# Altium PCB AltiumPCB_MRR_ESP_3DP_v0.5.pcbdoc
Units mm, origin at the board's own origin, x right, y up, seen from the top; angles counter-clockwise.
Board outline 135.64 x 130.3 mm, 2 copper layers (Top Layer, Bottom Layer); 117 components, 145 nets, 437 pads, 70 vias.
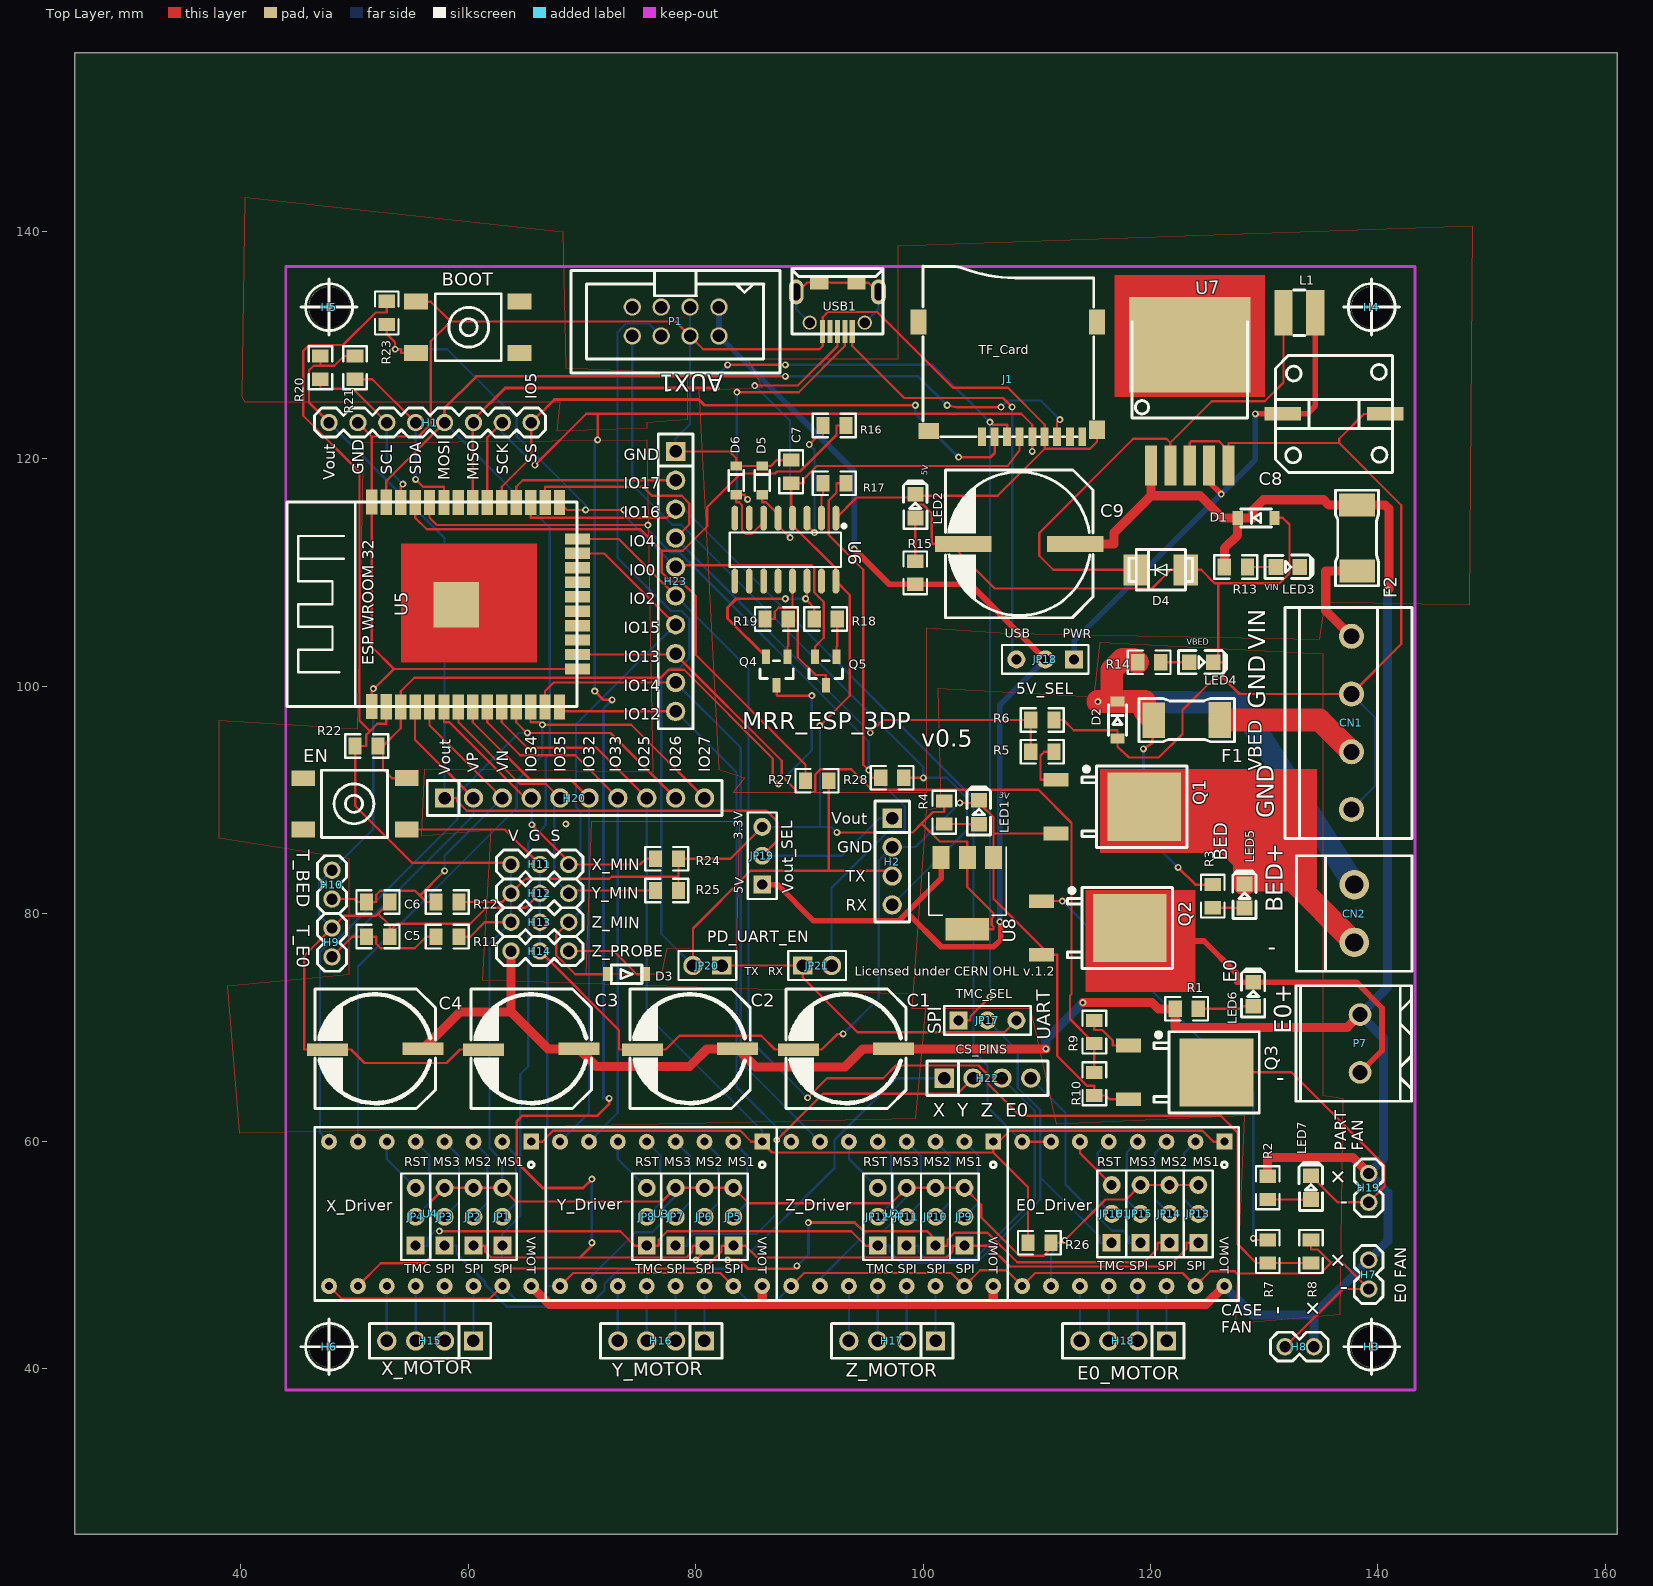
[diagram p0: Top Layer view]
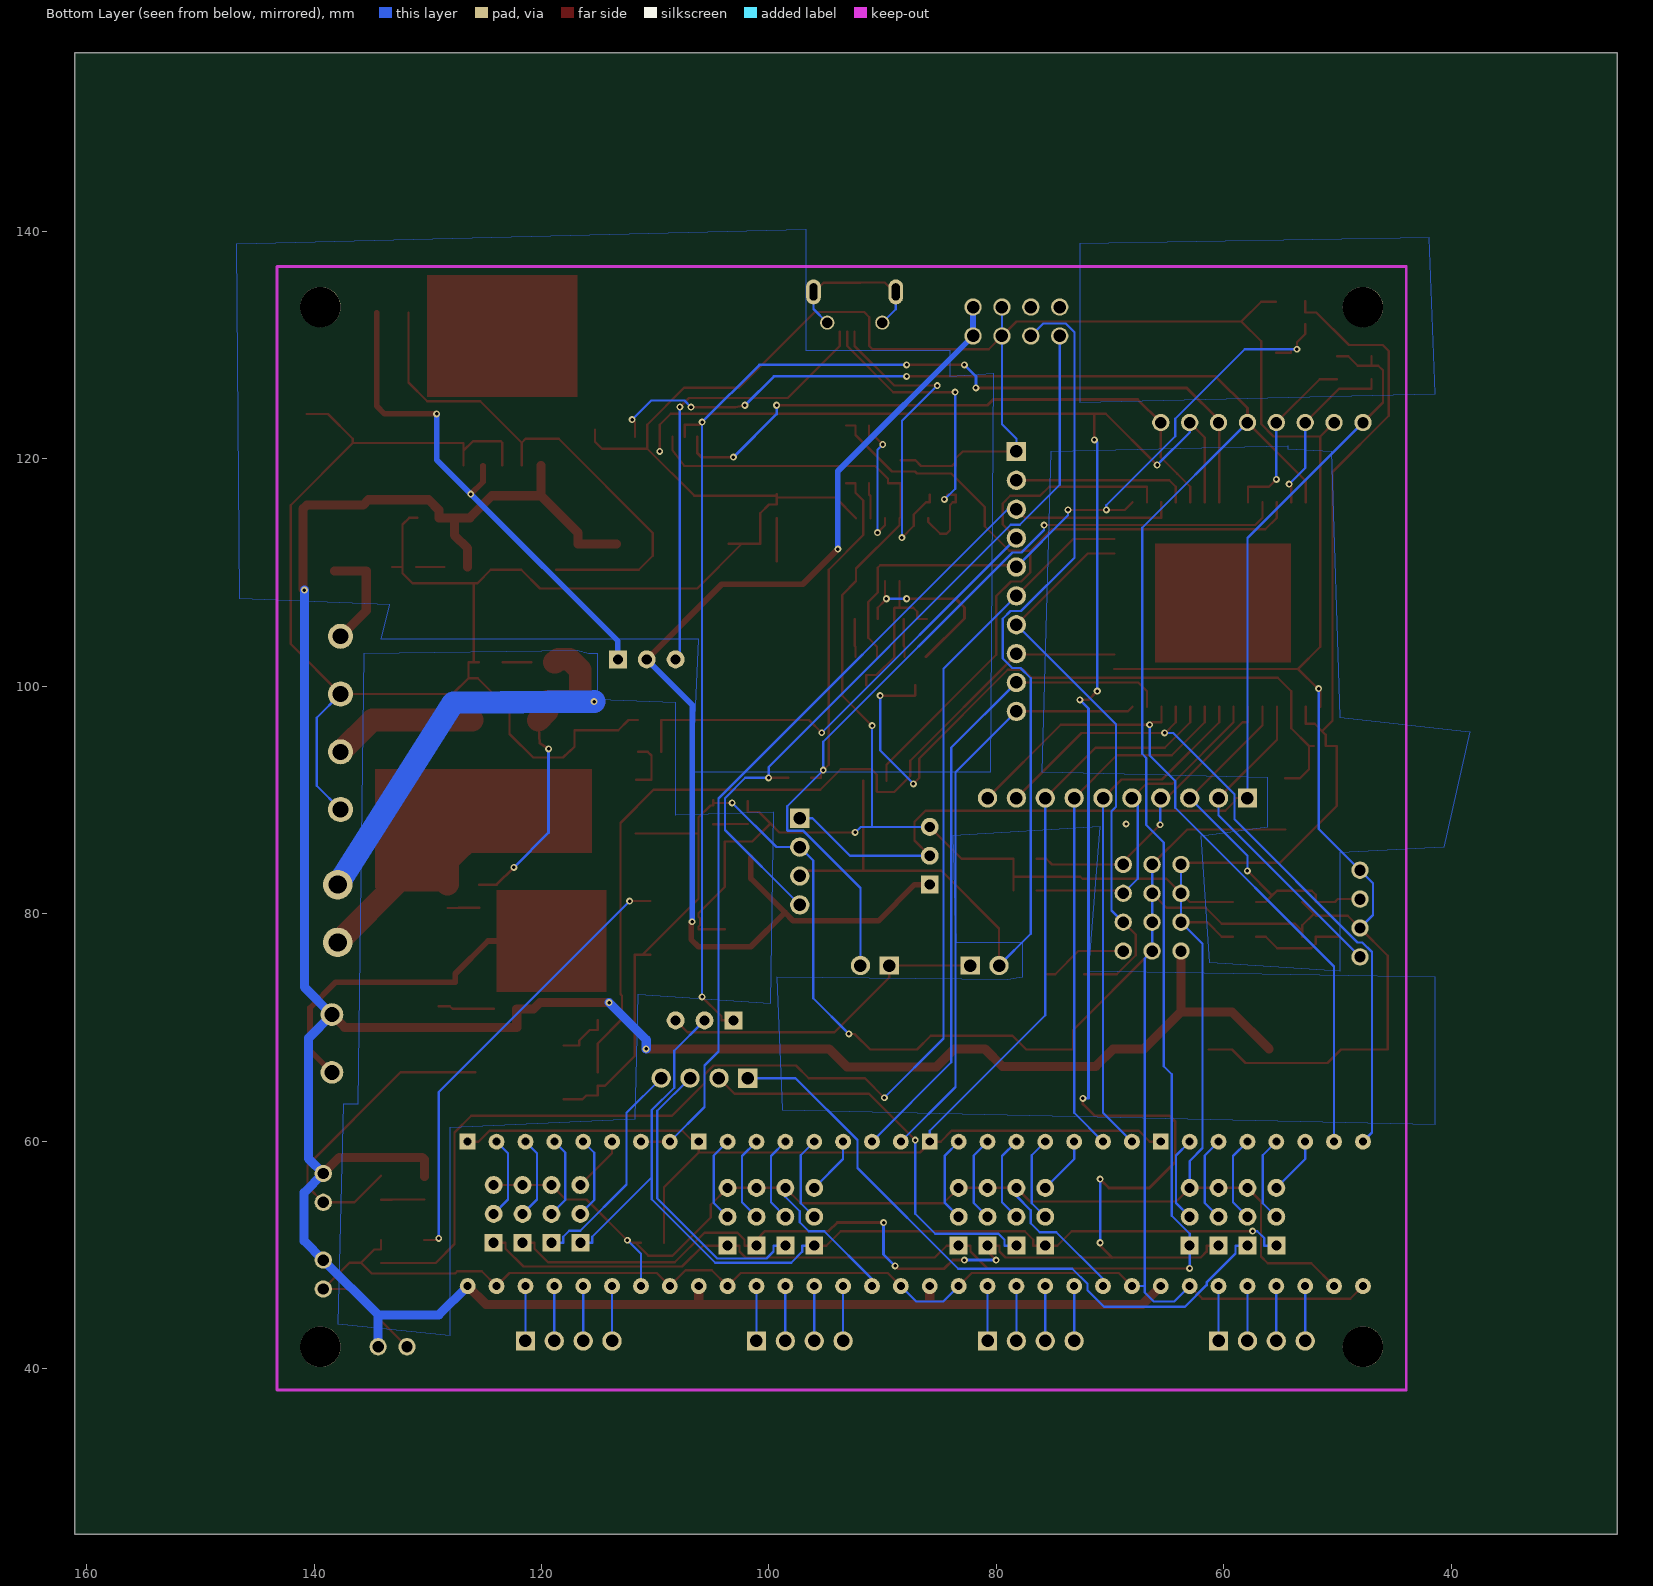
[diagram p1: Bottom Layer view, seen from below]

## Layer stack, top to bottom
Top Layer: signal copper (thickness not stored)
Dielectric: dielectric 0.32, FR-4, Dk 4.8
Bottom Layer: signal copper (thickness not stored)

## Board outline
161.036,25.4 25.4,25.4 25.4,155.702 161.036,155.702

## Components (designator, comment, footprint, x,y, rotation, side; value= is the part's Value field where it differs from the comment)
BOOT "SWITCH,6*6*2.5,SMD" KEY-6.0*6.0 59.944,131.572 r180 top
C1 "470uF" CAP-D10.0XH10.5 93.218,68.072 r0 top
C2 "470uF" CAP-D10.0XH10.5 79.502,68.072 r0 top
C3 "470uF" CAP-D10.0XH10.5 65.532,68.072 r0 top
C4 "470uF" CAP-D10.0XH10.5 51.816,68.072 r0 top
C5 "10uF" 0805 52.07,77.978 r0 top
C6 "10uF" 0805 52.07,81.026 r0 top
C7 "1nF" 0805 88.392,118.872 r90 top
C8 "330uF" CAP-T-10*10 136.144,123.952 r0 top
C9 "680uF" CAP-D12.5XH13.5 108.458,112.522 r0 top
CN1 "MKDS3/4-5.08" MKDS3/4-5.08 137.668,96.774 r90 top
CN2 "HEATBED" MKDS3/2-5.08 137.922,80.01 r0 top
D1 "1N4007" SOD-123F 129.286,114.808 r180 top
D2 "1N4007" SOD-123F 117.094,97.028 r90 top
D3 "1N4148W" SOD-123FL 73.914,74.676 r0 top
D4 "SS54" SMB(DO-214AA) 120.904,110.236 r180 top
D5 "PESD5V0S1BA" SOD-323 85.852,118.11 r90 top
D6 "PESD5V0S1BA" SOD-323 83.566,118.11 r90 top
EN "SWITCH,6*6*2.5,SMD" KEY-6.0*6.0 50.038,89.662 r0 top
F1 "0451020.MRL" SMF_045X 123.19,97.028 r180 top
F2 "0451003.MRL" SMF_045X 138.176,113.03 r90 top
H1 "I2C/SPI" 210S-1X8P 56.642,123.19 r0 top
H2 "Serial" DIP-1X4P-2.54MM-M 97.282,84.582 r270 top
H3 "HOLE" HOLE_3MM5 139.446,41.91 r0 top
H4 "HOLE" HOLE_3MM5 139.446,133.35 r0 top
H5 "HOLE" HOLE_3MM5 47.752,133.35 r0 top
H6 "HOLE" HOLE_3MM5 47.752,41.91 r0 top
H7 "FAN_HEATSINK" 210S-1X2P 139.192,48.26 r270 top
H8 "FAN_CASE" 210S-1X2P 133.096,41.91 r180 top
H9 "T_E0" 210S-1X2P 48.006,77.47 r90 top
H10 "T_BED" 210S-1X2P 48.006,82.55 r90 top
H11 "X_MIN" 210S-1X3P 66.294,84.328 r0 top
H12 "Y_MIN" 210S-1X3P 66.294,81.788 r0 top
H13 "Z_MIN" 210S-1X3P 66.294,79.248 r0 top
H14 "Z_PROBE" 210S-1X3P 66.294,76.708 r0 top
H15 "X_MOTOR" DIP-1X4P-2.54MM-M 56.642,42.418 r180 top
H16 "Y_MOTOR" DIP-1X4P-2.54MM-M 76.962,42.418 r180 top
H17 "Z_MOTOR" DIP-1X4P-2.54MM-M 97.282,42.418 r180 top
H18 "E0_MOTOR" DIP-1X4P-2.54MM-M 117.602,42.418 r180 top
H19 "FAN_E0" 210S-1X2P 139.192,55.88 r270 top
H20 "ESP_PINS1" DIP-1X10P-2.54MM-M 69.342,90.17 r0 top
H22 "CS_PINS" DIP-1X4P-2.54MM-M 105.664,65.532 r0 top
H23 "ESP_PINS2" DIP-1X10P-2.54MM-M 78.232,109.22 r270 top
J1 "Micro SD Card Holder" MICRO-SD9+4P-SMD-16.1X14.5X1.85MM 107.442,127 r90 top
JP1 "JP_X_MS1" HDR-3X1/2.54 62.992,53.34 r90 top
JP2 "JP_X_MS2" HDR-3X1/2.54 60.452,53.34 r90 top
JP3 "JP_X_MS3" HDR-3X1/2.54 57.912,53.34 r90 top
JP4 "JP_X_RST" HDR-3X1/2.54 55.372,53.34 r90 top
JP5 "JP_Y_MS1" HDR-3X1/2.54 83.312,53.34 r90 top
JP6 "JP_Y_MS2" HDR-3X1/2.54 80.772,53.34 r90 top
JP7 "JP_Y_MS3" HDR-3X1/2.54 78.232,53.34 r90 top
JP8 "JP_Y_RST" HDR-3X1/2.54 75.692,53.34 r90 top
JP9 "JP_Z_MS1" HDR-3X1/2.54 103.632,53.34 r90 top
JP10 "JP_Z_MS2" HDR-3X1/2.54 101.092,53.34 r90 top
JP11 "JP_Z_MS3" HDR-3X1/2.54 98.552,53.34 r90 top
JP12 "JP_Z_RST" HDR-3X1/2.54 96.012,53.34 r90 top
JP13 "JP_E0_MS1" HDR-3X1/2.54 124.206,53.594 r90 top
JP14 "JP_E0_MS2" HDR-3X1/2.54 121.666,53.594 r90 top
JP15 "JP_E0_MS3" HDR-3X1/2.54 119.126,53.594 r90 top
JP16 "JP_E0_RST" HDR-3X1/2.54 116.586,53.594 r90 top
JP17 "TMC_SEL" HDR-3X1/2.54 105.664,70.612 r0 top
JP18 "5V_SEL" HDR-3X1/2.54 110.744,102.362 r180 top
JP19 "Vout_SEL" HDR-3X1/2.54 85.852,85.09 r90 top
JP20 "PD_UART_TX" HDR-2X1/2.54 82.296,75.438 r270 top
JP21 "PD_UART_RX" HDR-2X1/2.54 89.408,75.438 r90 top
L1 "47uH" SLF4532 133.096,132.842 r0 top
LED1 "LED_3V" LED-0805#1 104.902,88.9 r270 top
LED2 "LED_5V" LED-0805#1 99.314,115.824 r270 top
LED3 "LED_VIN" LED-0805#2 132.08,110.49 r180 top
LED4 "LED_VBED" LED-0805#2 124.46,102.108 r180 top
LED5 "BED" LED-0805#1 128.27,81.534 r270 top
LED6 "E0" LED-0805#1 129.032,72.898 r270 top
LED7 "FAN_E0" LED-0805#1 134.112,55.88 r270 top
P1 "AUX1" HDR-IDC-2.54-2X4P 78.232,132.08 r180 top
P7 "HOTEND_E0" WJ500V-5.08-2P 138.43,68.58 r90 top
Q1 "IPD036N04L G" TO-252-2(2) 115.57,89.408 r270 top
Q2 "IRLR8743TRPBF" TO-252-2 114.3,78.74 r270 top
Q3 "IRLR8743TRPBF" TO-252-2 121.92,66.04 r270 top
Q4 "S9014" SOT-23(SOT-23-3) 87.122,101.346 r180 top
Q5 "S9014" SOT-23(SOT-23-3) 91.44,101.346 r180 top
R1 "1.5KΩ(152)" 0805 123.19,71.628 r0 top
R2 "1.5KΩ(152)" 0805 130.302,55.88 r270 top
R3 "1.5KΩ(152)" 0805 125.476,81.534 r270 top
R4 "220Ω(221)" 0805 101.854,88.9 r270 top
R5 "10Ω(10R)" 0805 110.49,94.234 r0 top
R6 "100K" 0805 110.49,97.028 r0 top
R7 "10Ω(10R)" 0805 130.302,50.292 r90 top
R8 "100K" 0805 134.112,50.292 r90 top
R9 "10Ω(10R)" 0805 115.062,69.596 r90 top
R10 "100K" 0805 115.062,65.024 r270 top
R11 "47KΩ(473)" 0805 58.166,77.978 r0 top
R12 "47KΩ(473)" 0805 58.166,81.026 r0 top
R13 "1.5KΩ(152)" 0805 127.508,110.49 r0 top
R14 "2.2K" 0805 119.888,102.108 r0 top
R15 "330Ω(331)" 0805 99.314,109.982 r90 top
R16 "0Ω" 0805 92.202,122.936 r0 top
R17 "0Ω" 0805 92.202,117.856 r0 top
R18 "12KΩ(123)" 0805 91.44,105.918 r0 top
R19 "12KΩ(123)" 0805 87.122,105.918 r0 top
R20 "4.7KΩ(472)" 0805 46.99,128.016 r90 top
R21 "4.7KΩ(472)" 0805 50.038,128.016 r90 top
R22 "12KΩ(123)" 0805 51.054,94.742 r180 top
R23 "12KΩ(123)" 0805 52.832,132.842 r90 top
R24 "10KΩ" 0805 77.47,84.836 r0 top
R25 "10KΩ" 0805 77.47,82.042 r0 top
R26 "10KΩ" 0805 110.236,51.054 r0 top
R27 "1KΩ" 0805 90.678,91.694 r0 top
R28 "1KΩ" 0805 97.282,91.948 r0 top
U1 "POLULU_DRIVER" POLULU_DRIVER 126.492,59.944 r180 top
U2 "POLULU_DRIVER" POLULU_DRIVER 106.172,59.944 r180 top
U3 "POLULU_DRIVER" POLULU_DRIVER 85.852,59.944 r180 top
U4 "POLULU_DRIVER" POLULU_DRIVER 65.532,59.944 r180 top
U5 "ESP32-WROOM" ESP32_WROOM_FOOTPRINT 58.928,107.188 r90 top
U6 "CH340C" SOP-16_150MIL 87.884,112.014 r270 top
U7 "LM2596SX-5.0/NOPB" TO-263-5 123.444,124.714 r270 top
U8 "AMS1117-3.3" SOT-223 103.886,81.788 r270 top
USB1 "micro USBFemale" MICRO-USB-1 92.456,133.35 r90 top

## Footprints (in the part's own frame and the unit in brackets; to place one, negate y for a bottom-side part, rotate by r counter-clockwise, add the part's x,y. Pads: shape width x height; smd on the part's side, far side on the other; paste and mask are expansions set on the pad)
210S-1X2P [mil]
  round 60 hole 39.37: 1(-50,0) 2(50,0)
  silkscreen extent -100,-50 100,50
210S-1X3P [mil]
  round 60 hole 39.37: 1(-100,0) 2(0,0) 3(100,0)
  silkscreen extent -150,-50 150,50
210S-1X8P [mil]
  round 60 hole 39.37: 1(-350,0) 2(-250,0) 3(-150,0) 4(-50,0) 5(50,0) 6(150,0) 7(250,0) 8(350,0)
  silkscreen extent -400,-50 400,50
0805 [mm]
  rect 1.16x1.47 smd: 1(-1.016,0) 2(1.016,0)
  silkscreen extent -1.9,-1.03 1.87,1.04
CAP-D10.0XH10.5 [mm]
  rect 3.6x1.1 smd: 1(4.191,0.025) 2(-4.191,-0.025)
  silkscreen extent -5.29,-5.22 5.29,5.3
CAP-D12.5XH13.5 [mm]
  rect 5x1.4 smd: 1(4.928,0) 2(-4.928,0)
  silkscreen extent -6.5,-6.5 6.5,6.5
CAP-T-10*10 [mm]
  rect 3.2x1.2 smd: 1(-4.501,0) 2(4.501,0)
  silkscreen extent -5.15,-5.15 5.15,5.15
DIP-1X4P-2.54MM-M [mm]
  rect 1.7x1.7 hole 1.1: 1(-3.81,0)
  round 1.7 hole 1.1: 2(-1.27,0) 3(1.27,0) 4(3.81,0)
  silkscreen extent -5.33,-1.52 5.33,1.52
DIP-1X10P-2.54MM-M [mm]
  rect 1.7x1.7 hole 1.1: 1(-11.43,0)
  round 1.7 hole 1.1: 2(-8.89,0) 3(-6.35,0) 4(-3.81,0) 5(-1.27,0) 6(1.27,0) 7(3.81,0) 8(6.35,0) 9(8.89,0) 10(11.43,0)
  silkscreen extent -12.95,-1.52 12.95,1.52
ESP32_WROOM_FOOTPRINT [mm]
  rect 2.2x1 smd: 1(-8.989,7.423) 2(-8.992,6.147) 3(-8.994,4.879) 4(-8.994,3.609) 5(-8.994,2.339) 6(-8.994,1.069) 7(-8.994,-0.201) 8(-8.997,-1.468) 9(-8.997,-2.738) 10(-8.997,-4.008) 11(-8.997,-5.278) 12(-8.994,-6.551) 13(-8.994,-7.821) 14(-8.994,-9.091) 25(8.992,-9.093) 26(8.992,-7.823) 27(8.992,-6.553) 28(8.989,-5.281) 29(8.989,-4.011) 30(8.989,-2.741) 31(8.989,-1.471) 32(8.992,-0.203) 33(8.992,1.067) 34(8.992,2.337) 35(8.992,3.607) 36(8.992,4.877) 37(8.994,6.144) 38(8.997,7.421)
  rect 1x2.2 smd: 15(-5.667,-10.693) 16(-4.397,-10.693) 17(-3.127,-10.693) 18(-1.859,-10.696) 19(-0.589,-10.696) 20(0.681,-10.696) 21(1.951,-10.696) 22(3.223,-10.693) 23(4.493,-10.693) 24(5.763,-10.693)
  rect 4x4 smd: 39(-0.001,-0.011)
  silkscreen extent -8.97,-10.63 9.03,14.87
HDR-2X1/2.54 [mm]
  rect 1.575x1.7 hole 1.1: 1(0,0)
  round 1.7 hole 1.1: 2(0,-2.54)
  silkscreen extent -1.27,-3.81 1.27,1.27
HDR-3X1/2.54 [mil]
  rect 62x62 hole 35: 1(-100,0)
  round 62 hole 35: 2(0,0) 3(100,0)
  silkscreen extent -150,-50 150,50
HDR-IDC-2.54-2X4P [mil]
  round 60 hole 43.3: 1(-150,-50) 2(-150,50) 3(-50,-50) 4(-50,50) 5(50,-50) 6(50,50) 7(150,-50) 8(150,50)
  silkscreen extent -361,-177 362,178
HOLE_3MM5 [mil]
  round 140 hole 140: 1(0,0)
  silkscreen extent -96,-96 96,96
KEY-6.0*6.0 [mm]
  rect 2.1x1.4 smd: 1(4.55,-2.252) 2(-4.553,-2.252) 3(4.553,2.252) 4(-4.553,2.249)
  silkscreen extent -2.95,-2.95 2.85,2.95
LED-0805#1 [mil]
  rect 51.2x55.1 smd: 1(40.7,0.05) 2(-42,0.05)
  silkscreen extent -88,-41 78,40
LED-0805#2 [mil]
  rect 51.2x55.1 smd: 1(41.4,-0.05) 2(-41.3,-0.05)
  silkscreen extent -88,-41 78,40
MICRO-SD9+4P-SMD-16.1X14.5X1.85MM [mil]
  rect 63x27.6 smd: 1(-199,89) 2(-199,45) 3(-199,2) 4(-199,-41) 5(-199,-85) 6(-199,-128) 7(-199,-171) 8(-199,-215) 9(-199,-258)
  rect 63x55.1 smd: G1(-175,-309.05)
  rect 86.6x55.1 smd: G2(199,-309.05) G3(199,308.95)
  rect 55.1x70.9 smd: G4(-179.05,273.95)
  silkscreen extent -199,-298 392,293
MICRO-USB-1 [mm]
  round 1.25 hole 0.9: 0(-1.371,2.431) 0(-1.371,-2.41)
  oval 2.2x1.3 hole 0.7 slot 1.5 at 0 deg: 0(1.329,3.619) 0(1.329,-3.619)
  rect 1.2x1.6 smd: 0(2.14,-1.684) 0(2.156,1.595)
  rect 2x0.45 smd: 1(-2.156,-1.311) 2(-2.156,-0.66) 3(-2.156,-0.011) 4(-2.156,0.639) 5(-2.156,1.289)
  silkscreen extent -2.36,-4 3.4,4
MKDS3/2-5.08 [mm]
  round 2.6 hole 1.6: 1(0,-2.54) 2(0,2.54)
  silkscreen extent -5.08,-5.08 5.08,5.08
MKDS3/4-5.08 [mm]
  round 2.2 hole 1.4: 1(-7.62,0) 2(-2.54,0) 3(2.54,0) 4(7.62,0)
  silkscreen extent -10.16,-5.33 10.16,5.84
POLULU_DRIVER [mil]
  rect 55x55 hole 28: 1(0,0)
  round 55 hole 28: 2(100,0) 3(200,0) 4(300,0) 5(400,0) 6(500,0) 7(600,0) 8(700,0) 9(700,500) 10(600,500) 11(500,500) 12(400,500) 13(300,500) 14(200,500) 15(100,500) 16(0,500)
  silkscreen extent -50,-50 750,550
SLF4532 [mm]
  rect 1.6x4 smd: 1(-1.4,0) 2(1.4,0)
  silkscreen extent -0.5,-2 0.5,2
SMB(DO-214AA) [mil]
  rect 85x108 smd: 1(-87,0) 2(87,0)
  silkscreen extent -110,-70 110,70
SMF_045X [mm]
  rect 2x3.15 smd: 1(-2.904,-0.013) 2(2.904,0.013)
  silkscreen extent -4.19,-1.89 4.21,1.91
SOD-123F [mil]
  rect 35.8x48 smd: 1(-64,0) 2(64,0)
  silkscreen extent -53,-31 53,31
SOD-123FL [mil]
  rect 35.8x48 smd: 1(64,0) 2(-64,0)
  silkscreen extent -53,-32 53,32
SOD-323 [mm]
  rect 0.8x1 smd: 1(-1.269,0) 2(1.271,0)
  silkscreen extent -0.89,-0.66 0.89,0.66
SOP-16_150MIL [mm]
  oval 2.2x0.6 smd: 1(-2.769,4.445) 2(-2.769,3.175) 3(-2.769,1.905) 4(-2.769,0.635) 5(-2.769,-0.635) 6(-2.769,-1.905) 7(-2.769,-3.175) 8(-2.769,-4.445) 9(2.769,-4.445) 10(2.769,-3.175) 11(2.769,-1.905) 12(2.769,-0.635) 13(2.769,0.635) 14(2.769,1.905) 15(2.769,3.175) 16(2.769,4.445)
  silkscreen extent -2.23,-4.9 1.52,5.3
SOT-23(SOT-23-3) [mm]
  rect 0.7x1.25 smd: 1(-0.95,-1.25) 2(0.95,-1.25) 3(0,1.25)
  silkscreen extent -1.46,-0.9 1.46,0.65
SOT-223 [mm]
  rect 2x1.5 smd: 1(-3.15,2.3) 2(-3.15,0) 3(-3.15,-2.3)
  rect 2x3.8 smd: 4(3.15,0)
  silkscreen extent -4.1,-3.41 1.91,3.41
TO-252-2 [mm]
  rect 1.2x2.2 smd: 1(-2.362,-3.876) 3(2.362,-3.871)
  rect 6x6.5 smd: 4(0,3.877)
  silkscreen extent -3.57,-1.61 3.57,7.64
TO-252-2(2) [mm]
  rect 1.2x2.2 smd: 1(-2.362,-3.876) 3(2.362,-3.871)
  rect 6x6.5 smd: 2(0,3.877)
  silkscreen extent -3.57,-1.61 3.57,7.64
TO-263-5 [mil]
  rect 137.79x42.1 smd: 1(209,-133.95) 2(209,-66.95) 3(209,0.05) 4(209,67.05) 5(209,134.05)
  rect 329.92x419.68 smd: 6(-209,0)
  silkscreen extent -289,-200 44,200
WJ500V-5.08-2P [mm]
  round 2 hole 1.3: 1(-2.54,0) 2(2.54,0)
  silkscreen extent -5.08,-4.52 5.08,5.64

## Via types
v1: diameter 0.61, hole 0.31, Top Layer to Bottom Layer, 48 vias
v2: diameter 0.62, hole 0.305, Top Layer to Bottom Layer, 22 vias

## Nets (pads, with @x,y where several pads share a name; then routed paths per layer and width w, separated by ;. In a path a pad name is that pad's centre, name@x,y a point inside that pad or via, vN(x,y) a via of type N, cw(c..) or ccw(c..) an arc to the next point about the centre after c; other vN are vias at no path point)
5V1: C8.1 JP18.1 L1.2 U7.4 | length 44.9
  Top Layer w0.5: U7.4@125.148,119.405 125.148,117.975 v1(126.22,116.901) ; v1(129.217,123.952) 129.492,123.952 C8.1 132.718,123.952 133.794,123.952 134.496,124.653 L1.2
  Bottom Layer w0.5: JP18.1 113.284,103.965 v1(126.22,116.901) 129.217,119.898 v1(129.217,123.952)
+3.3V: C7.1 H11.1 H12.1 H13.1 J1.4 JP1.3 JP2.3 JP3.3 JP5.3 JP6.3 JP7.3 JP9.3 JP10.3 JP11.3 JP13.3 JP14.3 JP15.3 JP19.3 R4.1 R11.2 R12.2 R22.2 R23.2 R24.2 R25.2 R26.2 U1.10 U2.10 U3.10 U4.10 U5.2 U6.4 U6.16 U8.2 U8.4 | length 347.3
  Top Layer w0.2: R22.2 R22.2@50.066,94.742 ; U4.10 52.296,49.248 56.131,49.248 56.723,49.842 56.723,54.691 JP3.3 JP2.3 JP1.3 64.181,54.691 77.043,54.691 JP7.3 JP6.3 JP5.3 84.663,54.529 97.201,54.529 JP11.3 JP10.3 JP9.3 105.11,54.402 105.11,53.284 108.483,49.911 110.599,49.911 R26.2@111.742,51.054 ; U5.2 52.781,96.695 51.991,96.695 51.346,96.05 ; R23.2 52.832,132.878 51.852,132.878 48.986,130.012 46.015,130.012 45.479,129.476 45.479,123.795 50.439,118.836 50.439,96.957 51.346,96.05 ; R11.2 60.162,77.978 61.432,79.248 H13.1 ; R12.2 62.992,81.026 H12.1 65.024,83.058 72.423,83.058 72.614,83.248 78.486,83.248 ; H11.1 63.614,84.468 55.057,84.468 50.066,89.459 R22.2@50.066,94.742 ; R25.2 78.486,83.248 ; JP19.3 83.058,84.836 R24.2 78.486,83.248 ; v1(90.927,96.535) 93.553,99.164 93.553,108.021 U6.16 92.329,110.348 88.519,114.158 U6.4 88.392,114.91 C7.1 89.527,117.856 89.527,118.257 90.65,119.38 107.442,119.38 108.483,120.744 J1.4 ; v1(92.415,87.14) 99.08,87.14 99.865,87.925 ; R4.1@101.857,89.916 101.857,88.936 100.876,88.936 99.865,87.925 ; U8.4 106.187,78.638 106.187,78.854 106.045,78.994 106.045,79.578 106.187,79.72 106.187,80.04 103.886,82.339 U8.2 103.886,86.34 101.453,86.34 99.865,87.925 ; R26.2 R26.2@111.742,51.054 ; v1(112.441,51.275) 112.232,51.067 v1@112.232,51.054 ; JP13.3 JP14.3 JP15.3 117.856,54.864 116.042,54.864 v1@112.232,51.054 ; R22.2@50.066,94.742 51.018,94.742 51.018,95.722 51.346,96.05 ; R26.2@111.742,51.054 v1@112.232,51.054
  Bottom Layer w0.2: JP1.3 62.992,58.25 61.854,59.388 61.854,77.348 H13.1 H12.1 H11.1 ; U3.10 70.612,47.879 74.722,51.989 76.177,51.989 76.962,52.774 76.962,53.901 78.232,55.171 JP7.3 ; JP19.3 90.927,87.63 ; v1(90.927,96.535) 90.927,87.63 ; U2.10 90.932,47.864 95.138,52.07 96.495,52.07 97.282,52.857 97.282,53.825 98.552,55.095 JP11.3 ; v1(92.415,87.14) 91.925,87.63 90.927,87.63 ; U1.10 111.252,50.089 v1(112.441,51.275)
+5V: JP18.2 JP19.1 P1.1 P1.2 R15.1 U8.3 | length 103.6
  Top Layer w0.5: JP19.1 87.191,82.55 90.373,79.365 97.859,79.365 98.59,80.099 ; v1(93.939,112.055) 97.028,108.966 R15.1 104.14,108.966 JP18.2 ; U8.3@101.587,84.938 101.587,83.094 98.59,80.099 ; v1(106.751,79.286) 106.837,79.2 106.837,77.737 106.187,77.086 101.603,77.086 98.59,80.099
  Bottom Layer w0.5: P1.1 P1.2 93.939,118.913 v1(93.939,112.055) ; v1(106.751,79.286) 106.751,98.369 JP18.2
BOOT_2: BOOT.2
BOOT_4: BOOT.4
D3_1: D3.1 H14.3 | length 7.5
  Top Layer w0.2: H14.3 72.791,76.708 74.823,74.676 D3.1
DTR: Q5.3 R19.1 U6.13 | length 14.3
  Top Layer w0.2: R19.1 86.947,105.918 86.947,106.55 87.312,106.914 88.519,106.914 ; U6.13 88.519,106.914 ; Q5.3 91.44,100.983 90.554,100.983 88.979,102.558 88.979,106.855 88.92,106.914 88.519,106.914
E0_CS: H22.4 JP15.1 | length 19.7
  Bottom Layer w0.2: H22.4 112.522,62.484 112.522,56.167 116.586,52.103 117.551,52.103 118.077,51.58 118.077,51.054 JP15.1
E0_DIR_PIN: H23.2 U5.28 | length 15.6
  Top Layer w0.2: U5.28 64.209,117.538 64.78,118.11 H23.2
E0_MS1: JP13.2 U1.2 | length 7.3
  Bottom Layer w0.2: U1.2 122.936,58.928 122.936,54.864 JP13.2
E0_MS2: JP14.2 U1.3 | length 7.3
  Bottom Layer w0.2: U1.3 120.396,58.928 120.396,54.864 JP14.2
E0_MS3: JP15.2 U1.4 | length 7.3
  Bottom Layer w0.2: U1.4 117.909,58.981 117.909,54.811 JP15.2
E0_RST: JP16.2 U1.5 | length 7.3
  Bottom Layer w0.2: U1.5 115.357,58.969 115.357,54.823 JP16.2
E0_SLP: JP16.3 U1.6 | length 5
  Top Layer w0.2: U1.6 113.792,58.928 JP16.3
E0_STEP_PIN: H23.3 U1.7 U1.8 U5.27 | length 85.7
  Top Layer w0.2: U5.27 65.481,114.818 77.48,114.818 H23.3 ; U1.8 U1.7
  Bottom Layer w0.2: H23.3 79.002,115.57 104.435,90.137 104.435,67.874 105.664,66.645 105.664,62.992 U1.8
EN: EN.3 Q4.3 R22.1 U5.3 | length 62.5
  Top Layer w0.2: R22.1 R22.1@52.492,94.742 ; EN.3@54.592,91.912 53.279,91.912 52.492,92.7 R22.1@52.492,94.742 ; Q4.3 87.122,99.21 87.16,99.172 v1(90.211,99.172) ; v1(87.285,91.42) 86.784,91.923 86.784,93.64 78.981,101.443 77.6,101.443 76.914,100.757 55.25,100.757 54.049,99.555 U5.3 54.049,96.299 R22.1@52.492,94.742
  Bottom Layer w0.2: v1(87.285,91.42) 90.211,94.346 v1(90.211,99.172)
EN_2: EN.2
EN_4: EN.4
F1_1: CN1.2 F1.1 | length 12.7
  Top Layer w2: F1.1 134.861,97.041 CN1.2
F2_1: CN1.4 F2.1 | length 9.4
  Top Layer w0.8: CN1.4 135.412,106.65 135.412,110.124 F2.1
FAN_E0_PIN: H23.8 R9.1 R10.1 U5.16 | length 75.8
  Top Layer w0.2: U5.16 70.983,102.791 H23.8@78.232,102.791 ; H23.8 H23.8@78.232,102.791 ; R10.1 115.062,66.883 R9.1 112.916,70.726 112.916,72.781 113.06,72.926 113.06,87.978 110.145,90.896 95.481,90.896 93.685,92.69 90.968,92.69 90.503,92.227 90.503,90.757 90.444,90.698 88.971,90.698 87.566,92.1 87.566,93.457 H23.8@78.232,102.791
GND: BOOT.1 C1.2 C2.2 C3.2 C4.2 C5.2 C6.2 C7.2 C8.2 C9.2 CN1.1 CN1.3 D1.1 D2.1 D4.1 D5.2 D6.2 EN.1 H1.2 H2.2 H7.2 H8.2 H9.2 H10.2 H11.2 H12.2 H13.2 H14.2 H23.1 J1.6 J1.G1 LED1.2 LED2.2 LED3.2 LED4.2 P1.3 P1.4 Q1.3 Q2.3 Q3.3 R6.2 R8.2 R10.2 U1.9 U1.15 U2.9 U2.15 U3.9 U3.15 U4.9 U4.15 U5.1 U5.15 U5.38 U6.1 U7.3 U7.5 U8.1 USB1.5 | length 667.1
  Top Layer w0.2: U4.9 48.87,46.126 61.874,46.126 U4.15 ; H1.2 51.509,121.973 ; U5.1 51.506,99.56 v1@51.694,99.751 ; v1(51.651,99.792) v1@51.694,99.751 ; C5.2 C5.2@53.086,78.476 ; C6.2 52.06,80 ; EN.1@54.59,87.409 63.213,87.409 H11.2 ; BOOT.1@55.395,133.822 56.706,133.822 58.45,132.08 ; C3.2 59.279,68.047 58.09,66.858 50.879,66.858 49.687,68.047 47.64,68.047 C4.2 45.563,68.047 45.563,76.297 H9.2 49.083,79.817 51.877,79.817 52.06,80 ; H14.2 73.249,69.753 73.249,68.047 C2.2 76.342,68.047 77.373,68.047 78.577,69.251 85.761,69.251 86.965,68.047 C1.2 91.089,68.047 92.464,69.418 v1(92.956,69.418) ; H12.2 65.024,80.518 61.567,80.518 60.162,79.113 53.724,79.113 C5.2@53.086,78.476 ; U3.9 69.23,48.402 82.154,48.402 U3.15 ; U5.15 53.464,101.521 ; H23.1 82.959,120.65 83.566,120.043 D6.2@83.566,119.713 ; D6.2 D6.2@83.566,119.713 ; U2.9 89.55,48.402 102.474,48.402 U2.15 105.016,48.628 107.328,48.628 U1.9 109.855,48.387 122.809,48.387 U1.15 125.252,48.544 127.414,48.544 127.61,48.349 134.927,48.349 135.877,49.299 ; C7.2 87.122,119.888 86.614,119.38 D5.2 85.09,119.38 83.896,119.38 D6.2@83.566,119.713 ; U6.1 94.143,116.596 LED2.2@99.317,116.596 ; LED2.2@99.317,116.891 LED2.2@99.317,116.743 ; v1(103.226,89.738) LED1.2@104.905,89.738 ; C9.2 C9.2@102.39,112.522 ; LED1.2@104.905,89.967 LED1.2@104.905,89.738 ; Q2.3 Q2.3@111.11,76.378 ; R6.2 112.347,97.028 113.256,96.119 117.094,96.119 D2.1 117.094,94.686 118.11,93.726 120.734,93.726 122.806,95.804 122.806,97.909 125.608,100.711 126.421,100.711 ; Q1.3 110.338,87.046 106.187,87.046 ; J1.G1@115.293,122.555 115.293,121.493 114.684,120.884 110.693,120.884 ; Q3.3 116.39,63.678 116.058,64.008 115.341,64.008 R10.2 115.062,64.851 114.43,64.851 111.79,67.49 111.79,76.378 Q2.3@111.11,76.378 ; U7.3@123.447,119.405 123.447,121.417 123.584,121.557 126.014,121.557 126.85,120.724 U7.5@126.85,120.401 ; LED4.2 LED4.2@125.966,102.108 ; U7.5@126.85,119.405 U7.5@126.85,120.401 ; D1.1 131.628,114.808 132.217,114.221 132.217,110.49 ; H8.2 136.906,46.99 H7.2 136.883,49.299 135.877,49.299 ; LED3.2 132.217,110.49 ; R8.2@134.112,51.305 134.112,50.465 134.714,50.465 135.877,49.299 ; C8.2 138.783,123.952 136.594,121.763 136.594,121.397 ; 51.509,121.973 51.509,116.185 51.509,103.48 53.464,101.521 ; 51.509,121.973 55.621,121.973 56.703,123.058 56.703,130.335 58.45,132.08 ; v1@51.694,99.751 53.464,101.521 ; 52.06,80 53.086,78.974 C5.2@53.086,78.476 ; 58.45,132.08 78.232,132.08 P1.4 80.665,129.647 90.884,129.647 91.168,129.931 91.168,130.653 91.168,131.194 91.168,132.456 91.615,132.905 95.974,132.905 102.634,126.246 107.457,126.246 110.693,123.007 J1.6 110.693,121.46 110.693,120.973 110.693,120.884 ; LED2.2@99.317,116.596 LED2.2@99.317,116.743 ; LED2.2@99.317,116.596 99.317,115.979 100,115.979 100.769,115.209 100.769,112.522 C9.2@102.39,112.522 ; LED2.2@99.317,116.743 106.553,116.743 110.693,120.884 ; C9.2@102.39,112.522 106.309,108.603 120.137,108.603 121.773,110.236 D4.1 124.455,110.236 125.628,109.063 125.966,109.063 ; LED1.2@104.905,89.738 104.905,89.51 105.143,89.51 106.187,88.468 106.187,87.046 ; 106.187,87.046 U8.1 106.187,81.303 Q2.3@111.11,76.378 ; LED4.2@125.966,102.108 125.966,109.063 ; LED4.2@125.966,102.108 126.421,102.108 126.421,100.711 ; 125.966,109.063 131.338,109.063 132.217,109.941 132.217,110.49 ; 126.421,100.711 127.82,99.314 CN1.3 142.062,103.708 142.062,115.928 136.594,121.397 ; U7.5@126.85,120.401 126.85,121.397 136.594,121.397
  Bottom Layer w0.2: H9.2 46.871,79.875 46.871,82.682 H10.2 51.651,87.465 v1(51.651,99.792) ; U4.15 64.348,45.888 66.149,45.888 66.942,46.68 66.942,47.244 ; H11.2 H12.2 H13.2 H14.2 66.942,76.06 66.942,47.244 ; U3.9 66.942,47.244 ; H23.1 78.232,121.763 79.502,123.033 P1.4 P1.3 ; U3.15 84.668,45.888 87.036,45.888 U2.9 ; v1(92.956,69.418) 96.098,72.563 96.098,84.668 H2.2 99.339,85.852 v1(103.226,89.738) ; CN1.1 139.761,91.244 139.761,97.221 CN1.3
HEATER_BED_PIN: H23.4 R5.1 R6.1 U5.26 | length 59.8
  Top Layer w0.2: U5.26 66.751,117.541 75.352,117.541 76.149,116.746 78.763,116.746 79.436,116.073 79.436,114.234 H23.4 ; v1(95.352,95.91) 96.467,97.028 R6.1 R5.1
  Bottom Layer w0.2: H23.4 v1(95.352,95.91)
HEATER_E0_PIN: H23.6 R7.1 R8.1 U5.24 | length 118.5
  Top Layer w0.2: U5.24 73.231,112.951 H23.6 ; v1(89.85,63.81) 91.554,65.514 96.484,65.514 97.617,66.645 104.879,66.645 105.664,65.86 105.664,65.075 108.524,62.217 126.185,62.217 127.643,60.759 127.643,50.937 129.306,49.273 130.302,49.273 R8.1@134.112,49.273
  Bottom Layer w0.2: H23.6 84.635,101.547 84.635,69.025 v1(89.85,63.81)
IO0: BOOT.3 H23.5 Q5.2 R23.1 U5.25 | length 62.1
  Top Layer w0.2: R23.1 52.832,130.985 53.553,130.264 v1(53.553,129.637) 54.079,129.637 54.079,129.319 54.734,129.319 BOOT.3@55.392,129.319 ; U5.25 68.697,115.504 v1(70.322,115.504) v1(73.693,115.504) ; H23.5 78.374,110.632 90.208,110.632 90.424,110.416 90.424,108.247 91.265,107.404 91.265,104.259 90.49,103.482 Q5.2
  Bottom Layer w0.2: v1(53.553,129.637) 58.148,129.637 64.262,123.52 64.262,121.989 70.322,115.928 v1(70.322,115.504) ; v1(73.693,115.504) 73.693,115.029 H23.5
J1_1: J1.1
J1_8: J1.8
J1_9: J1.9
J1_G2: J1.G2
J1_G3: J1.G3
J1_G4: J1.G4
LED1_1: LED1.1 R4.2 | length 3.1
  Top Layer w0.2: R4.2@101.857,87.884 103.924,87.884 103.942,87.866 LED1.1@104.905,87.866
LED2_1: LED2.1 R15.2 | length 3.8
  Top Layer w0.2: R15.2 99.314,111.839 99.317,111.841 LED2.1@99.317,114.79
LED3_1: LED3.1 R13.2 | length 2.5
  Top Layer w0.2: R13.2 130.114,110.49 130.117,110.49 LED3.1
LED4_1: LED4.1 R14.2 | length 2.5
  Top Layer w0.2: R14.2 122.494,102.108 122.497,102.108 LED4.1
LED5_1: LED5.1 R3.2 | length 2.8
  Top Layer w0.2: R3.2 127.292,80.518 127.31,80.5 LED5.1@128.273,80.5
LED6_1: LED6.1 R1.2 | length 4.9
  Top Layer w0.2: R1.2 127.836,71.628 128.072,71.864 LED6.1@129.035,71.864
LED7_1: LED7.1 R2.2 | length 3.8
  Top Layer w0.2: R2.2@130.305,54.864 133.134,54.864 133.152,54.846 LED7.1@134.115,54.846
LED7_2: H19.2 LED7.2 Q3.4 | length 28
  Top Layer w0.2: Q3.4@125.799,66.04 132.403,66.04 140.584,57.859 140.584,56.002 H19.2 136.451,54.61 LED7.2@134.115,56.947
MISO: H1.6 J1.3 JP17.1 U5.31 | length 114.4
  Top Layer w0.2: U5.31 60.399,123.137 H1.6 ; JP17.1 104.173,70.612 104.173,70.978 v1(105.875,72.677) ; v1(105.875,123.233) 106.101,123.007 107.391,123.007 J1.3
  Top Layer w0.24: H1.6 60.452,123.444 63.246,126.238 v2(81.788,126.238) ; v2(82.804,128.27) v2(87.884,128.27)
  Bottom Layer w0.2: v1(105.875,72.677) v1(105.875,123.233)
  Bottom Layer w0.24: v2(81.788,126.238) 81.788,127.254 v2(82.804,128.27) ; v2(87.884,128.27) 100.838,128.27 v1(105.875,123.233)
MOSI: H1.5 J1.7 JP1.1 JP5.1 JP9.1 JP13.1 U5.37 | length 214.7
  Top Layer w0.2: U5.37 52.784,118.062 H1.5 ; v1(62.992,48.796) 80.782,48.796 82.263,50.274 82.263,50.8 JP5.1 84.361,50.8 85.413,49.751 102.057,49.751 102.583,50.274 102.583,50.8 103.106,50.8 JP9.1 105.799,50.8 107.643,48.956 121.585,48.956 123.157,50.528 123.157,51.054 JP13.1 ; J1.7 111.785,123.2 v1(112.029,123.444)
  Top Layer w0.24: H1.5 57.912,124.46 60.706,127.254 v2(87.884,127.254) ; v2(102.108,124.714) 102.956,124.546 v1(106.85,124.546)
  Bottom Layer w0.2: H1.5 67.168,113.934 67.168,94.061 66.802,93.693 66.802,87.79 65.27,86.258 65.27,66.586 64.564,65.883 64.564,53.421 62.992,51.849 62.992,51.326 JP1.1 v1(62.992,48.796) ; v1(106.85,124.546) 107.429,125.125 110.348,125.125 v1(112.029,123.444)
  Bottom Layer w0.24: v2(87.884,127.254) 99.568,127.254 v2(102.108,124.714)
MOTOR_EN_PIN: H20.8 R26.1 U1.1 U2.1 U3.1 U4.1 U5.10 | length 124.7
  Top Layer w0.2: U5.10 62.936,96.83 65.174,94.59 71.272,94.59 H20.8 ; U4.1 66.492,59.944 67.455,60.904 83.929,60.904 84.892,59.944 85.372,59.944 U3.1@85.75,59.944 ; U3.1 U3.1@85.75,59.944 ; U2.1 U2.1@106.172,59.464 ; R26.1 109.22,55.936 106.172,58.984 ; U1.1 125.532,59.944 124.569,60.904 107.615,60.904 U2.1@106.172,59.464 ; U3.1@85.75,59.944 86.713,58.984 106.172,58.984 ; 106.172,58.984 U2.1@106.172,59.464
  Bottom Layer w0.2: H20.8 75.692,71.064 85.852,60.904 U3.1
PD_UART: JP17.3 JP20.1 JP21.1 | length 29.4
  Top Layer w0.2: JP20.1 JP21.1 89.408,74.389 94.234,69.563 107.155,69.563 JP17.3
Q1_1: Q1.1 R5.2 | length 4.8
  Top Layer w0.2: R5.2 110.665,94.234 110.333,93.901 110.333,91.77 Q1.1
Q1_2: CN2.1 LED5.2 Q1.2 | length 25.3
  Top Layer w2: Q1.2@119.449,89.408 124.498,89.408 125.832,88.075 125.832,87.071 128.273,84.63 LED5.2@128.273,82.951 ; LED5.2@128.273,82.601 LED5.2@128.273,82.951 ; CN2.1 132.441,82.951 LED5.2@128.273,82.951
Q2_1: Q2.1 R7.2 | length 39.8
  Top Layer w0.2: Q2.1 v1(112.243,81.102) ; v1(129.037,51.44) 129.172,51.44 129.306,51.305 R7.2@130.302,51.305
  Bottom Layer w0.2: v1(112.243,81.102) 129.037,64.308 v1(129.037,51.44)
Q2_4: LED6.2 P7.1 Q2.4 | length 32.1
  Top Layer w0.5: Q2.4@118.179,78.74 118.179,78.544 119.126,77.597 124.704,77.597 127.584,74.717 127.584,73.965 129.035,73.965 138.102,73.965 140.358,71.709 140.358,67.968 P7.1
Q4_1: Q4.1 R19.2 | length 3.3
  Top Layer w0.2: Q4.1 88.072,103.482 88.138,103.548 R19.2
Q5_1: Q5.1 R18.2 | length 3.3
  Top Layer w0.2: Q5.1 92.39,103.482 92.456,103.548 R18.2
R9_2: Q3.1 R9.2 | length 4.6
  Top Layer w0.2: R9.2 115.062,69.769 115.748,69.769 116.683,68.834 116.683,68.402 Q3.1
RTS: Q4.2 R18.1 U6.14 | length 16.5
  Top Layer w0.2: U6.14 89.789,107.549 90.424,106.914 R18.1
  Top Layer w0.24: Q4.2 82.804,105.964 82.804,106.934 83.566,107.696 v2(87.884,107.696)
  Bottom Layer w0.24: v2(87.884,107.696) v2(89.662,107.696)
RX: JP21.2 R17.2 R28.1 U5.34 | length 102.3
  Top Layer w0.2: U5.34 56.591,114.818 57.231,114.176 v1(75.799,114.176) ; R17.2 92.377,117.856 92.377,117.015 91.694,116.332 91.694,113.297 94.739,110.251 94.739,93.101 v1(95.22,92.621) 95.425,92.418 95.425,91.948 R28.1
  Bottom Layer w0.2: v1(75.799,114.176) 75.799,113.751 77.782,111.765 78.572,111.765 95.22,95.12 v1(95.22,92.621) 98.395,89.446 98.395,87.338 98.336,87.279 96.967,87.279 91.948,82.26 JP21.2
RXD: H2.4 P1.8 R28.2 | length 68.3
  Top Layer w0.2: R28.2 v1(100.023,91.948)
  Bottom Layer w0.2: P1.8 74.422,117.711 77.94,114.196 78.727,114.196 100.023,92.9 v1(100.023,91.948) 102.075,91.948 103.866,90.157 103.866,87.356 H2.4
S$15: 
S$17: 
S$18: 
S$19: 
S$20: 
S$39: 
S$41: 
S$43: 
S$91: 
S$93: 
S$150: 
S$152: 
S$180: 
S$236: 
S$240: 
SCK: H1.7 J1.5 JP2.1 JP6.1 JP10.1 JP14.1 U5.30 | length 225.2
  Top Layer w0.2: JP2.1 61.501,50.8 61.501,50.274 62.027,49.751 79.197,49.751 79.723,50.274 79.723,50.8 JP6.1@80.246,50.8 ; U5.30 61.669,121.867 H1.7 ; v1(65.855,119.459) 70.366,123.97 108.641,123.97 109.601,123.007 109.601,122.476 J1.5 v1(109.601,120.65) ; JP6.1 JP6.1@80.246,50.8 ; JP6.1@81.153,51.305 80.65,50.8 JP6.1@80.246,50.8 ; JP10.1@100.879,50.658 101.021,50.8 JP10.1 101.618,50.8 102.141,50.8 102.141,51.326 102.758,51.94 105.667,51.94 108.275,49.332 119.418,49.332 120.617,50.528 120.617,51.054 JP14.1
  Top Layer w0.24: 69.823,49.751 70.866,50.794 v2(70.866,51.054) ; v2(70.866,56.642) 70.104,55.88 66.548,55.88 64.262,58.166 64.262,58.42 64.262,61.722 64.77,62.23 71.374,62.23 72.39,63.246 v2(72.39,63.754) ; v2(71.12,99.568) 71.882,98.806 v2(72.644,98.806) ; v2(71.374,121.666) 71.374,123.85 71.494,123.97 ; v2(80.01,49.53) 80.772,50.292 JP6.1 ; v2(82.804,49.53) 83.82,49.53 84.582,48.768 88.646,48.768 v2(88.9,49.022) ; v2(89.916,52.832) 93.98,52.832 94.742,52.07 100.33,52.07 101.092,51.308 JP10.1
  Bottom Layer w0.2: H1.7 62.992,122.321 v1(65.855,119.459)
  Bottom Layer w0.24: v2(70.866,51.054) v2(70.866,56.642) ; v2(71.12,99.568) 71.12,121.412 v2(71.374,121.666) ; v2(72.39,63.754) 71.882,63.754 71.882,98.044 v2(72.644,98.806) ; v2(80.01,49.53) v2(82.804,49.53) ; v2(88.9,49.022) 89.916,50.038 v2(89.916,52.832)
  other v2: 68.58,87.884
SCL: H1.3 R20.1 U5.36 | length 15.6
  Top Layer w0.2: R20.1 46.99,126.159 49.863,126.159 H1.3 ; U5.36 54.051,117.579 v1(54.249,117.775)
  Bottom Layer w0.2: H1.3 52.832,119.192 v1(54.249,117.775)
SDA: H1.4 R21.1 U5.33 | length 16
  Top Layer w0.2: R21.1 51.562,127 H1.4 ; v1(55.372,118.191) 56.022,117.541 57.861,117.541 U5.33
  Bottom Layer w0.2: v1(55.372,118.191) H1.4
SS: H1.8 J1.2 U5.29 | length 53.8
  Top Layer w0.2: U5.29 62.939,117.538 64.092,118.692 65.532,120.132 H1.8
  Top Layer w0.24: H1.8 67.564,125.222 80.264,125.222 80.772,124.714 v2(99.314,124.714) ; v2(103.124,120.142) 105.918,120.142 106.299,120.523 J1.2
  Bottom Layer w0.24: v2(99.314,124.714) 99.314,123.952 v2(103.124,120.142)
TEMP_BED_PIN: C6.1 H10.1 H20.3 R12.1 U5.5 | length 32.7
  Top Layer w0.2: H10.1 49.959,81.28 50.213,81.026 C6.1 51.895,81.026 51.895,81.656 52.261,82.022 55.311,82.022 55.74,81.595 ; U5.5 56.589,96.573 H20.3 ; R12.1 56.309,81.026 55.74,81.595 ; v1(57.907,83.762) 55.74,81.595
  Bottom Layer w0.2: v1(57.907,83.762) 57.907,85.085 H20.3
TEMP_E0_PIN: C5.1 H9.1 H20.2 R11.1 U5.4 | length 40.4
  Top Layer w0.2: H9.1 49.784,77.978 C5.1 51.895,77.978 51.895,77.346 52.294,76.949 55.281,76.949 56.309,77.978 R11.1 ; U5.4 55.319,95.303 H20.2
  Bottom Layer w0.2: H9.1 60.452,88.646 H20.2
TMC: JP4.1 JP8.1 JP12.1 JP16.1 JP17.2 | length 87.6
  Top Layer w0.2: v1(57.447,52.07) 73.373,52.07 74.643,50.8 JP8.1 76.741,50.8 76.741,51.326 77.488,52.07 93.69,52.07 94.963,50.8 JP12.1
  Bottom Layer w0.2: JP4.1 56.421,50.8 56.421,51.448 57.046,52.07 v1(57.447,52.07) ; JP12.1 97.061,50.8 97.061,50.274 98.039,49.299 104.719,49.299 110.292,54.872 110.292,56.825 ; JP17.2 108.334,67.942 108.334,64.691 110.292,62.733 110.292,56.825 ; JP16.1 115.537,51.054 115.537,51.58 110.292,56.825
TX: R16.2 R27.1 U5.35 | length 72.5
  Top Layer w0.2: U5.35 55.321,114.818 56.337,113.8 75.133,113.8 77.018,111.915 ; R27.1 89.662,93.101 80,102.763 80,107.927 78.707,109.22 77.803,109.22 77.018,110.002 77.018,111.915 ; R16.2 92.377,122.936 92.377,122.095 89.174,118.892 87.14,118.892 86.967,118.72 83.967,118.72 81.016,115.768 81.016,114.074 78.857,111.915 77.018,111.915
TXD: H2.3 JP20.2 P1.6 R27.2 | length 97.1
  Top Layer w0.2: JP20.2 79.756,78.692 84.826,83.762 91.694,83.762 ; R27.2 91.694,83.762 ; H2.3 96.832,83.762 91.694,83.762
  Bottom Layer w0.2: P1.6 75.875,131.897 73.894,131.897 73.124,131.127 73.124,111.31 77.818,106.617 78.753,106.617 79.433,105.938 79.433,102.431 78.603,101.6 77.861,101.6 76.962,100.701 76.962,78.232 JP20.2
U1_11: H18.4 U1.11 | length 4.8
  Bottom Layer w0.2: H18.4 U1.11
U1_12: H18.3 U1.12 | length 4.8
  Bottom Layer w0.2: H18.3 U1.12
U1_13: H18.2 U1.13 | length 4.8
  Bottom Layer w0.2: H18.2 U1.13
U1_14: H18.1 U1.14 | length 4.8
  Bottom Layer w0.2: H18.1 U1.14
U2_11: H17.4 U2.11 | length 4.8
  Bottom Layer w0.2: H17.4 U2.11
U2_12: H17.3 U2.12 | length 4.8
  Bottom Layer w0.2: H17.3 U2.12
U2_13: H17.2 U2.13 | length 4.8
  Bottom Layer w0.2: H17.2 U2.13
U2_14: H17.1 U2.14 | length 4.8
  Bottom Layer w0.2: H17.1 U2.14
U3_11: H16.4 U3.11 | length 4.8
  Bottom Layer w0.2: H16.4 U3.11
U3_12: H16.3 U3.12 | length 4.8
  Bottom Layer w0.2: H16.3 U3.12
U3_13: H16.2 U3.13 | length 4.8
  Bottom Layer w0.2: H16.2 U3.13
U3_14: H16.1 U3.14 | length 4.8
  Bottom Layer w0.2: H16.1 U3.14
U4_11: H15.4 U4.11 | length 4.8
  Bottom Layer w0.2: H15.4 U4.11
U4_12: H15.3 U4.12 | length 4.8
  Bottom Layer w0.2: H15.3 U4.12
U4_13: H15.2 U4.13 | length 4.8
  Bottom Layer w0.2: H15.2 U4.13
U4_14: H15.1 U4.14 | length 4.8
  Bottom Layer w0.2: H15.1 U4.14
U5_17: U5.17
U5_18: U5.18
U5_19: U5.19
U5_20: U5.20
U5_21: U5.21
U5_22: U5.22
U5_32: U5.32
U6_2: R17.1 U6.2 | length 3.1
  Top Layer w0.2: U6.2 91.059,116.733 91.186,116.86 R17.1
U6_3: R16.1 U6.3 | length 12
  Top Layer w0.2: U6.3 89.789,114.163 v1(90.447,113.505) ; v1(89.987,121.262) 90.665,121.94 91.186,121.94 R16.1
  Bottom Layer w0.2: v1(89.987,121.262) 90.447,120.802 v1(90.447,113.505)
U6_5: D5.1 U6.5 USB1.3 | length 29.6
  Top Layer w0.2: v1(85.194,126.446) 88.981,126.446 92.469,129.931 USB1.3@92.469,131.194 ; D5.1 85.852,116.51 85.852,116.18 86.185,116.18 87.249,115.113 U6.5 87.249,114.117 v1(88.295,113.071)
  Bottom Layer w0.2: v1(85.194,126.446) 88.295,123.342 v1(88.295,113.071)
U6_6: D6.1 U6.6 USB1.2 | length 29.8
  Top Layer w0.2: v1(83.617,125.865) 89.052,125.865 93.116,129.931 USB1.2 ; v1(84.562,116.436) 84.328,116.667 84.328,116.84 D6.1 83.566,116.51 83.566,116.18 83.82,116.18 84.074,115.926 84.074,113.711 84.379,113.406 84.938,113.406 85.979,114.447 U6.6
  Bottom Layer w0.2: v1(83.617,125.865) 83.617,117.378 v1(84.562,116.436)
U6_7: U6.7
U6_8: U6.8
U6_9: U6.9
U6_10: U6.10
U6_11: U6.11
U6_12: U6.12
U6_15: U6.15
U7_2: D4.2 L1.1 U7.2 | length 46.4
  Top Layer w0.2: D4.2 111.445,110.236 110.206,111.476 110.206,113.482 118.478,121.757 121.404,121.757 121.745,121.417 ; U7.2@121.745,119.405 121.745,121.417 ; L1.1 131.696,126.723 130.038,125.065 125.39,125.065 121.745,121.417
USB1_0: USB1.0 | length 14.3
  Top Layer w0.2: USB1.0@88.837,134.678 88.971,134.678 89.799,135.506 90.861,135.506 91.923,135.506 91.94,135.489 94.14,135.489 94.671,135.489 95.202,135.489 96.015,134.678 USB1.0@96.075,134.678
  Bottom Layer w0.2: USB1.0@88.837,134.678 88.837,133.167 USB1.0@90.025,131.978 ; USB1.0@94.866,131.978 96.075,133.187 USB1.0@96.075,134.678
USB1_4: USB1.4
VBED: CN2.2 D2.2 F1.2 R3.1 R14.1 | length 61.5
  Top Layer w0.24: v2(119.38,94.488) 120.142,94.996 F1.2 ; v2(122.428,84.074) 123.952,82.55 R3.1
  Top Layer w2: v1(115.369,98.654) D2.2 ; R14.1 118.791,102.108 118.524,102.375 117.528,102.375 116.591,101.435 116.591,100.376 116.591,99.157 D2.2 ; F1.2 119.505,97.796 119.505,98.654 D2.2
  Bottom Layer w0.24: v2(119.38,94.488) 119.38,87.122 v2(122.428,84.074)
  Bottom Layer w2: v1(115.369,98.654) 127.762,98.552 CN2.2
VIN: C1.1 C2.1 C3.1 C4.1 C9.1 D1.2 F2.2 H7.1 H8.1 H14.1 H19.1 P7.2 R1.1 R2.1 R13.1 U1.16 U2.16 U3.16 U4.16 U7.1 | length 302.1
  Top Layer w0.8: C4.1 59.273,71.364 63.754,71.364 ; H14.1 63.754,71.364 ; U4.16 67.153,45.623 85.852,45.623 ; U3.16 85.852,45.623 ; U2.16 106.172,45.623 ; v1(110.79,68.097) C1.1 96.058,68.097 94.706,68.097 93.124,66.515 85.275,66.515 C2.1 80.99,68.097 79.464,66.568 71.252,66.568 C3.1 67.02,68.097 63.754,71.364 ; C9.1 116.787,112.522 116.787,113.497 120.043,116.754 ; v1(114.059,72.177) 120.145,72.177 120.693,71.628 R1.1 122.174,69.992 137.302,69.992 P7.2 ; U7.1@120.043,119.405 120.043,117.079 120.043,116.754 ; U1.16 124.871,45.623 106.172,45.623 ; R13.1 126.492,112.128 127.66,113.297 D1.2 ; R2.1@130.305,56.896 130.305,58.377 130.495,58.567 137.775,58.567 H19.1 ; v1(140.856,108.445) 140.965,108.555 140.965,115.608 140.64,115.933 138.163,115.933 136.926,115.933 135.687,115.933 135.219,116.403 129.934,116.403 129.017,115.486 129.017,114.808 D1.2 ; 85.852,45.623 106.172,45.623 ; 120.043,116.754 124.358,116.754 126.304,114.808 D1.2
  Bottom Layer w0.8: v1(110.79,68.097) 110.79,68.91 v1(114.059,72.177) ; U1.16 129.032,44.704 134.366,44.704 ; H8.1 134.366,44.704 ; v1(140.856,108.445) 140.856,73.546 P7.2 140.492,69.058 140.492,58.448 H19.1 140.881,55.461 140.881,51.219 H7.1 134.366,44.704
VOUT: H1.1 H2.1 H20.1 JP19.2 R20.2 R21.2 | length 94.6
  Top Layer w0.2: R20.2 46.99,128.191 ; H1.1 45.994,124.948 45.994,127.782 46.401,128.191 46.99,128.191 ; R21.2 49.042,129.032 48.199,128.191 46.99,128.191 ; H20.1 59.025,90.17 59.025,89.891 59.858,89.057 86.225,89.057 87.203,88.08 87.203,86.441 JP19.2
  Bottom Layer w0.2: H1.1 57.912,113.03 H20.1 ; JP19.2 92.867,85.09 96.169,88.392 H2.1
VUSB: JP18.3 USB1.1 | length 39.9
  Top Layer w0.2: USB1.1 93.767,129.931 98.344,125.354 107.031,125.354 v1(107.828,124.559)
  Bottom Layer w0.2: v1(107.828,124.559) 107.828,102.738 JP18.3
X_CS: H22.1 JP3.1 | length 56.8
  Bottom Layer w0.2: JP3.1 58.961,50.8 58.961,50.109 61.501,47.569 61.501,47.328 63.409,45.42 70.526,45.42 71.981,46.876 71.981,47.44 73.309,48.768 83.348,48.768 92.202,57.622 92.202,60.084 97.65,65.532 H22.1
X_DIR_PIN: H20.9 U4.8 U5.11 | length 62.7
  Top Layer w0.2: U5.11 64.206,96.83 65.143,95.89 v1(65.194,95.89) 72.512,95.89 H20.9
  Bottom Layer w0.2: U4.8 46.954,60.742 46.954,76.619 47.805,77.47 48.23,77.47 59.052,88.295 59.052,90.51 64.435,95.89 v1(65.194,95.89)
X_MIN: H11.3 H20.4 R24.1 U5.6 | length 26.8
  Top Layer w0.2: U5.6 57.859,96.832 58.339,96.832 65.001,90.17 H20.4 ; v1(65.59,87.82) 68.834,84.577 H11.3 75.105,84.328 75.613,84.836 R24.1
  Bottom Layer w0.2: H20.4 65.59,90.112 v1(65.59,87.82)
X_MS1: JP1.2 U4.2 | length 7.6
  Bottom Layer w0.2: JP1.2 64.201,54.549 64.201,58.735 U4.2
X_MS2: JP2.2 U4.3 | length 7.6
  Bottom Layer w0.2: JP2.2 61.661,54.549 61.661,58.735 U4.3
X_MS3: JP3.2 U4.4 | length 7.7
  Bottom Layer w0.2: JP3.2 59.182,54.61 59.182,58.674 U4.4
X_RST: JP4.2 U4.5 | length 7.6
  Bottom Layer w0.2: JP4.2 56.558,54.526 56.558,58.758 U4.5
X_SLP: JP4.3 U4.6 | length 5.1
  Bottom Layer w0.2: U4.6 52.832,58.42 JP4.3
X_STEP_PIN: H20.10 U4.7 U5.12 | length 62.8
  Top Layer w0.2: U5.12 65.479,96.832 66.291,96.832 v1(66.51,96.614) 74.328,96.614 H20.10
  Bottom Layer w0.2: U4.7 50.292,75.344 64.262,89.314 64.262,91.669 66.51,93.914 v1(66.51,96.614)
Y_CS: H22.2 JP7.1 | length 36.4
  Top Layer w0.2: v1(87.13,60.089) 91.201,64.16 103.022,64.16 H22.2
  Bottom Layer w0.2: JP7.1 79.281,50.8 79.281,51.326 79.807,51.849 85.377,51.849 87.13,53.602 v1(87.13,60.089)
Y_DIR_PIN: H20.6 U3.8 U5.8 | length 45.6
  Top Layer w0.2: U5.8 60.396,96.83 65.428,91.798 68.984,91.798 H20.6
  Bottom Layer w0.2: U3.8 70.612,62.484 H20.6
Y_MIN: H12.3 H20.5 R25.1 U5.7 | length 29.9
  Top Layer w0.2: U5.7 59.129,96.832 64.531,91.43 66.812,91.43 H20.5 ; H12.3 69.088,82.042 R25.1
  Bottom Layer w0.2: H20.5 67.564,89.662 67.564,83.058 H12.3
Y_MS1: JP5.2 U3.2 | length 7.6
  Bottom Layer w0.2: JP5.2 84.521,54.549 84.521,58.735 U3.2
Y_MS2: JP6.2 U3.3 | length 7.6
  Bottom Layer w0.2: JP6.2 81.981,54.549 81.981,58.735 U3.3
Y_MS3: JP7.2 U3.4 | length 7.7
  Bottom Layer w0.2: JP7.2 79.502,54.61 79.502,58.674 U3.4
Y_RST: JP8.2 U3.5 | length 7.6
  Bottom Layer w0.2: JP8.2 76.878,54.526 76.878,58.758 U3.5
Y_SLP: JP8.3 U3.6 | length 5.1
  Bottom Layer w0.2: U3.6 73.152,58.42 JP8.3
Y_STEP_PIN: H20.7 U3.7 U5.9 | length 46.9
  Top Layer w0.2: U5.9 61.666,96.83 64.567,93.927 69.395,93.927 H20.7
  Bottom Layer w0.2: U3.7 73.152,62.484 H20.7
Z_CS: H22.3 JP11.1 | length 26
  Bottom Layer w0.2: JP11.1 99.601,50.8 99.601,50.274 100.203,49.675 104.531,49.675 109.812,54.955 109.812,62.654 H22.3
Z_DIR_PIN: H23.10 U2.8 U5.14 | length 52.4
  Top Layer w0.2: U5.14 68.423,97.79 H23.10
  Bottom Layer w0.2: H23.10 83.589,92.433 83.589,64.747 U2.8
Z_MIN: D3.2 H13.3 H23.7 U5.23 | length 50.2
  Top Layer w0.2: H13.3 67.744,78.158 67.744,76.34 69.408,74.676 D3.2 ; U5.23 71.961,111.681 H23.7
  Bottom Layer w0.2: H13.3 69.858,80.272 69.858,89.009 69.472,89.395 69.472,96.65 H23.7
Z_MS1: JP9.2 U2.2 | length 7.6
  Bottom Layer w0.2: JP9.2 104.841,54.549 104.841,58.735 U2.2
Z_MS2: JP10.2 U2.3 | length 7.7
  Bottom Layer w0.2: JP10.2 102.362,54.61 102.362,58.674 U2.3
Z_MS3: JP11.2 U2.4 | length 7.7
  Bottom Layer w0.2: JP11.2 99.822,54.61 99.822,58.674 U2.4
Z_RST: JP12.2 U2.5 | length 7.6
  Bottom Layer w0.2: JP12.2 97.198,54.526 97.198,58.758 U2.5
Z_SLP: JP12.3 U2.6 | length 5.1
  Bottom Layer w0.2: U2.6 93.472,58.42 JP12.3
Z_STEP_PIN: H23.9 U2.7 U5.13 | length 58.8
  Top Layer w0.2: U5.13 66.749,99.555 67.523,100.33 H23.9
  Bottom Layer w0.2: H23.9 83.952,94.61 83.952,66.924 U2.7
pads on no net: H3.1 H4.1 H5.1 H6.1 P1.5 P1.7 U5.39 U7.6

## Polygon pours and split planes (outlines as drawn)
GND on Bottom Layer (solid): 41.91,139.446 72.644,138.938 72.644,124.968 41.402,125.73
GND on Bottom Layer (solid): 96.774,140.208 96.774,129.54 84.074,129.54 84.074,127.254 80.264,127.508 80.518,92.456 106.68,92.456 106.172,104.14 134.112,104.14 133.35,107.188 146.558,107.696 146.812,138.938
GND on Bottom Layer (solid): 116.84,103.124 135.636,102.87 136.144,63.246 137.414,63.246 137.922,43.942 128.016,42.926 128.016,61.214 111.76,61.976 111.506,72.898 99.822,72.136 99.568,88.9 108.204,88.646 108.204,98.552 115.062,98.806 115.062,102.87 115.824,102.87
GND on Bottom Layer (solid): 54.356,120.904 50.546,120.65 49.784,97.282 38.354,96.012 40.64,85.852 49.784,85.344 49.784,74.93 61.214,75.692 61.976,86.868 56.134,87.63 56.134,91.948 75.946,92.456 75.184,120.65 54.356,121.158
GND on Bottom Layer (solid): 41.402,74.422 71.882,74.93 70.866,87.63 83.82,86.868 83.566,77.47 77.724,77.47 77.724,74.422 78.994,74.168 99.314,74.422 98.806,62.738 41.402,61.468
GND on Top Layer (solid): 50.8,121.412 75.692,121.666 76.2,92.456 56.134,92.71 55.88,86.868 61.976,87.376 61.214,74.168 100.33,72.898 99.314,61.976 39.878,60.706 38.862,73.66 49.53,74.676 49.53,84.836 38.1,86.614 38.1,97.028 50.292,96.266
GND on Top Layer (solid): 107.442,104.648 134.874,104.14 135.382,107.442 148.082,107.188 148.336,140.462 97.79,138.684 97.79,128.778 84.582,128.778 85.852,126.238 80.264,125.984 82.042,92.71 84.328,91.948 83.312,90.678 100.33,90.678 100.33,105.156
GND on Top Layer (solid): 101.346,99.822 115.062,99.06 115.57,103.886 135.128,102.87 135.128,64.008 136.906,63.754 136.652,44.704 127.508,43.942 128.27,62.23 111.76,61.468 109.474,71.628 99.06,71.628 100.33,89.154 101.6,89.408
GND on Top Layer (solid): 70.866,88.138 83.82,88.138 83.566,76.708 77.47,76.962 76.962,74.676 70.358,74.676
GND on Top Layer (solid): 40.386,143.002 68.326,139.954 68.58,128.016 79.248,127.508 79.248,123.444 75.692,123.19 75.692,122.682 67.818,122.428 68.072,124.968 40.386,124.968 40.132,125.476

## Other copper
Top Layer:
  region net Q2_4: 114.3,82.042 123.952,82.042 123.952,73.152 114.3,73.152 114.3,73.66 114.3,77.724
  region: 54.102,102.108 54.102,112.522 66.04,112.522 66.04,102.108
  region net Q1_2: 115.57,92.71 134.62,92.71 134.62,82.296 128.778,82.296 128.778,85.344 115.57,85.344
  region: 116.84,136.144 116.84,125.476 130.048,125.476 130.048,136.144

## Silkscreen, mask and mechanical layers (free items; w line width, h text height)
Top Overlay:
  text "TF_Card" at 104.902,129.211 h0.8
  text "IO5" at 66.032,125.222 h1 r90
  text "GND" at 73.66,119.858 h1
  text "SS" at 66.032,119.634 h1 r90
  text "GND" at 50.792,118.618 h1 r90
  text "SCL" at 53.332,118.618 h1 r90
  text "SDA" at 55.872,118.618 h1 r90
  text "SCK" at 63.492,118.618 h1 r90
  text "5V" at 100.342,118.523 h0.5 r84
  text "MOSI" at 58.374,118.125 h1 r90
  text "MISO" at 60.914,118.125 h1 r90
  text "Vout" at 48.252,118.101 h1 r89
  text "IO17" at 73.66,117.356 h1
  text "IO16" at 73.66,114.816 h1
  text "IO4" at 74.168,112.276 h1
  text "IO0" at 74.168,109.736 h1
  text "VIN" at 130.048,108.444 h0.5
  text "IO2" at 74.168,107.196 h1
  text "IO15" at 73.66,104.656 h1
  text "USB" at 107.188,104.248 h0.8
  text "PWR" at 112.261,104.248 h0.8 r359
  text "VBED" at 123.19,103.636 h0.5
  text "VIN" at 130.092,103.226 h1.5 r90
  text "IO13" at 73.66,102.116 h1
  text "IO14" at 73.66,99.576 h1
  text "5V_SEL" at 108.204,99.284 h1
  text "GND" at 130.092,98.021 h1.5 r90
  text "IO12" at 73.66,97.036 h1
  text "MRR_ESP_3DP" at 84.074,96.222 h1.5
  text "v0.5" at 99.822,94.698 h1.5
  text "VBED" at 129.779,92.586 h1.2 r90
  text "VP" at 60.951,92.491 h1 r94
  text "VN" at 63.492,92.456 h1 r90
  text "IO34" at 66.032,92.456 h1 r90
  text "IO35" at 68.572,92.456 h1 r90
  text "IO32" at 71.112,92.456 h1 r90
  text "IO33" at 73.436,92.456 h1 r90
  text "IO25" at 75.938,92.456 h1 r90
  text "IO26" at 78.732,92.456 h1 r90
  text "IO27" at 81.272,92.456 h1 r90
  text "Vout" at 58.412,92.193 h1 r89
  text "3V" at 106.645,90.176 h0.5 r352
  text "GND" at 130.854,88.369 h1.5 r90
  text "Vout" at 91.939,87.892 h1 r359
  text "3.3V" at 84.149,86.507 h0.8 r90
  text "V  G  S" at 63.5,86.368 h1
  text "T_BED" at 44.895,85.598 h1.14 r270
  text "GND" at 92.456,85.352 h1
  text "BED" at 126.731,84.673 h1.2 r90
  text "X_MIN" at 70.866,83.828 h1
  text "TX" at 93.218,82.812 h1
  text "Vout_SEL" at 88.638,81.797 h1 r91
  text "5V" at 84.147,81.692 h0.8 r85
  text "Y_MIN" at 70.866,81.288 h1
  text "RX" at 93.218,80.272 h1
  text "BED+" at 131.616,80.107 h1.5 r90
  text "T_E0" at 44.895,78.994 h1.14 r270
  text "Z_MIN" at 70.857,78.748 h1 r359
  text "-" at 131.064,77.501 h1.5 r180
  text "PD_UART_EN" at 81.026,77.478 h1
  text "Z_PROBE" at 70.866,76.208 h1
  text "TX" at 84.328,74.58 h0.7
  text "RX" at 86.36,74.58 h0.7
  text "Licensed under CERN OHL v.1.2" at 93.98,74.53 h0.8
  text "E0" at 127.6,73.914 h1.2 r90
  text "E0+" at 132.378,69.439 h1.5 r90
  text "SPI" at 101.585,69.38 h1.2 r90
  text "UART" at 111.237,68.918 h1.2 r91
  text "-" at 131.826,66.028 h1.5 r180
  text "X  Y  Z  E0" at 100.838,62.138 h1.2
  text "PART / FAN" at 138.714,59.167 h1 r90
  text "+" at 136.63,57.934 h1.5 r225
  text "RST" at 54.356,57.766 h0.8
  text "MS3" at 56.896,57.766 h0.8
  text "MS2" at 59.69,57.766 h0.8
  text "MS1" at 62.484,57.766 h0.8
  text "RST" at 74.676,57.766 h0.8
  text "MS3" at 77.216,57.766 h0.8
  text "MS2" at 80.01,57.766 h0.8
  text "MS1" at 82.804,57.766 h0.8
  text "RST" at 94.742,57.766 h0.8
  text "MS3" at 97.282,57.766 h0.8
  text "MS2" at 100.076,57.766 h0.8
  text "MS1" at 102.87,57.766 h0.8
  text "RST" at 115.316,57.766 h0.8
  text "MS3" at 118.11,57.766 h0.8
  text "MS2" at 120.904,57.766 h0.8
  text "MS1" at 123.698,57.766 h0.8
  text "-" at 136.652,54.007 h1.5
  text "Y_Driver" at 67.827,53.856 h1 r1
  text "Z_Driver" at 87.884,53.856 h1
  text "E0_Driver" at 108.204,53.856 h1
  text "X_Driver" at 47.507,53.772 h1 r1
  text "VMOT" at 65.132,51.562 h0.8 r270
  text "VMOT" at 85.452,51.562 h0.8 r270
  text "VMOT" at 105.772,51.562 h0.8 r270
  text "VMOT" at 126.092,51.562 h0.8 r270
  text "+" at 136.63,50.568 h1.5 r225
  text "TMC" at 115.316,48.622 h0.8
  text "SPI" at 118.11,48.622 h0.8
  text "SPI" at 120.65,48.622 h0.8
  text "SPI" at 123.19,48.622 h0.8
  text "TMC" at 54.356,48.368 h0.8
  text "SPI" at 57.15,48.368 h0.8
  text "SPI" at 59.69,48.368 h0.8
  text "SPI" at 62.23,48.368 h0.8
  text "TMC" at 74.676,48.368 h0.8
  text "SPI" at 77.47,48.368 h0.8
  text "SPI" at 80.01,48.368 h0.8
  text "SPI" at 82.55,48.368 h0.8
  text "TMC" at 94.996,48.368 h0.8
  text "SPI" at 97.79,48.368 h0.8
  text "SPI" at 100.33,48.368 h0.8
  text "SPI" at 102.87,48.368 h0.8
  text "-" at 136.652,46.494 h1.5
  text "E0 FAN" at 142.486,45.72 h1 r90
  text "-" at 131.814,44.704 h1.5 r90
  text "+" at 134.134,44.174 h1.5 r45
  text "CASE / FAN" at 126.238,43.15 h1
  text "X_MOTOR" at 52.334,39.385 h1.2 r1
  text "Y_MOTOR" at 72.654,39.278 h1.2 r1
  text "Z_MOTOR" at 93.218,39.278 h1.2
  text "E0_MOTOR" at 113.538,39.024 h1.2

## Text inside footprints (layer, text, board x,y; h text height)
U5: Top Overlay "ESP WROOM 32" at 51.697,101.851 h1.02 r90